# Altium PCB LLY.PcbDoc (part 1 of 2)
Units mm, origin at the board's own origin, x right, y up, seen from the top; angles counter-clockwise.
Board outline 253.36 x 130.77 mm, 2 copper layers (Top Layer, Bottom Layer), stack 0.325 mm thick; 280 components, 206 nets, 985 pads, 247 vias.
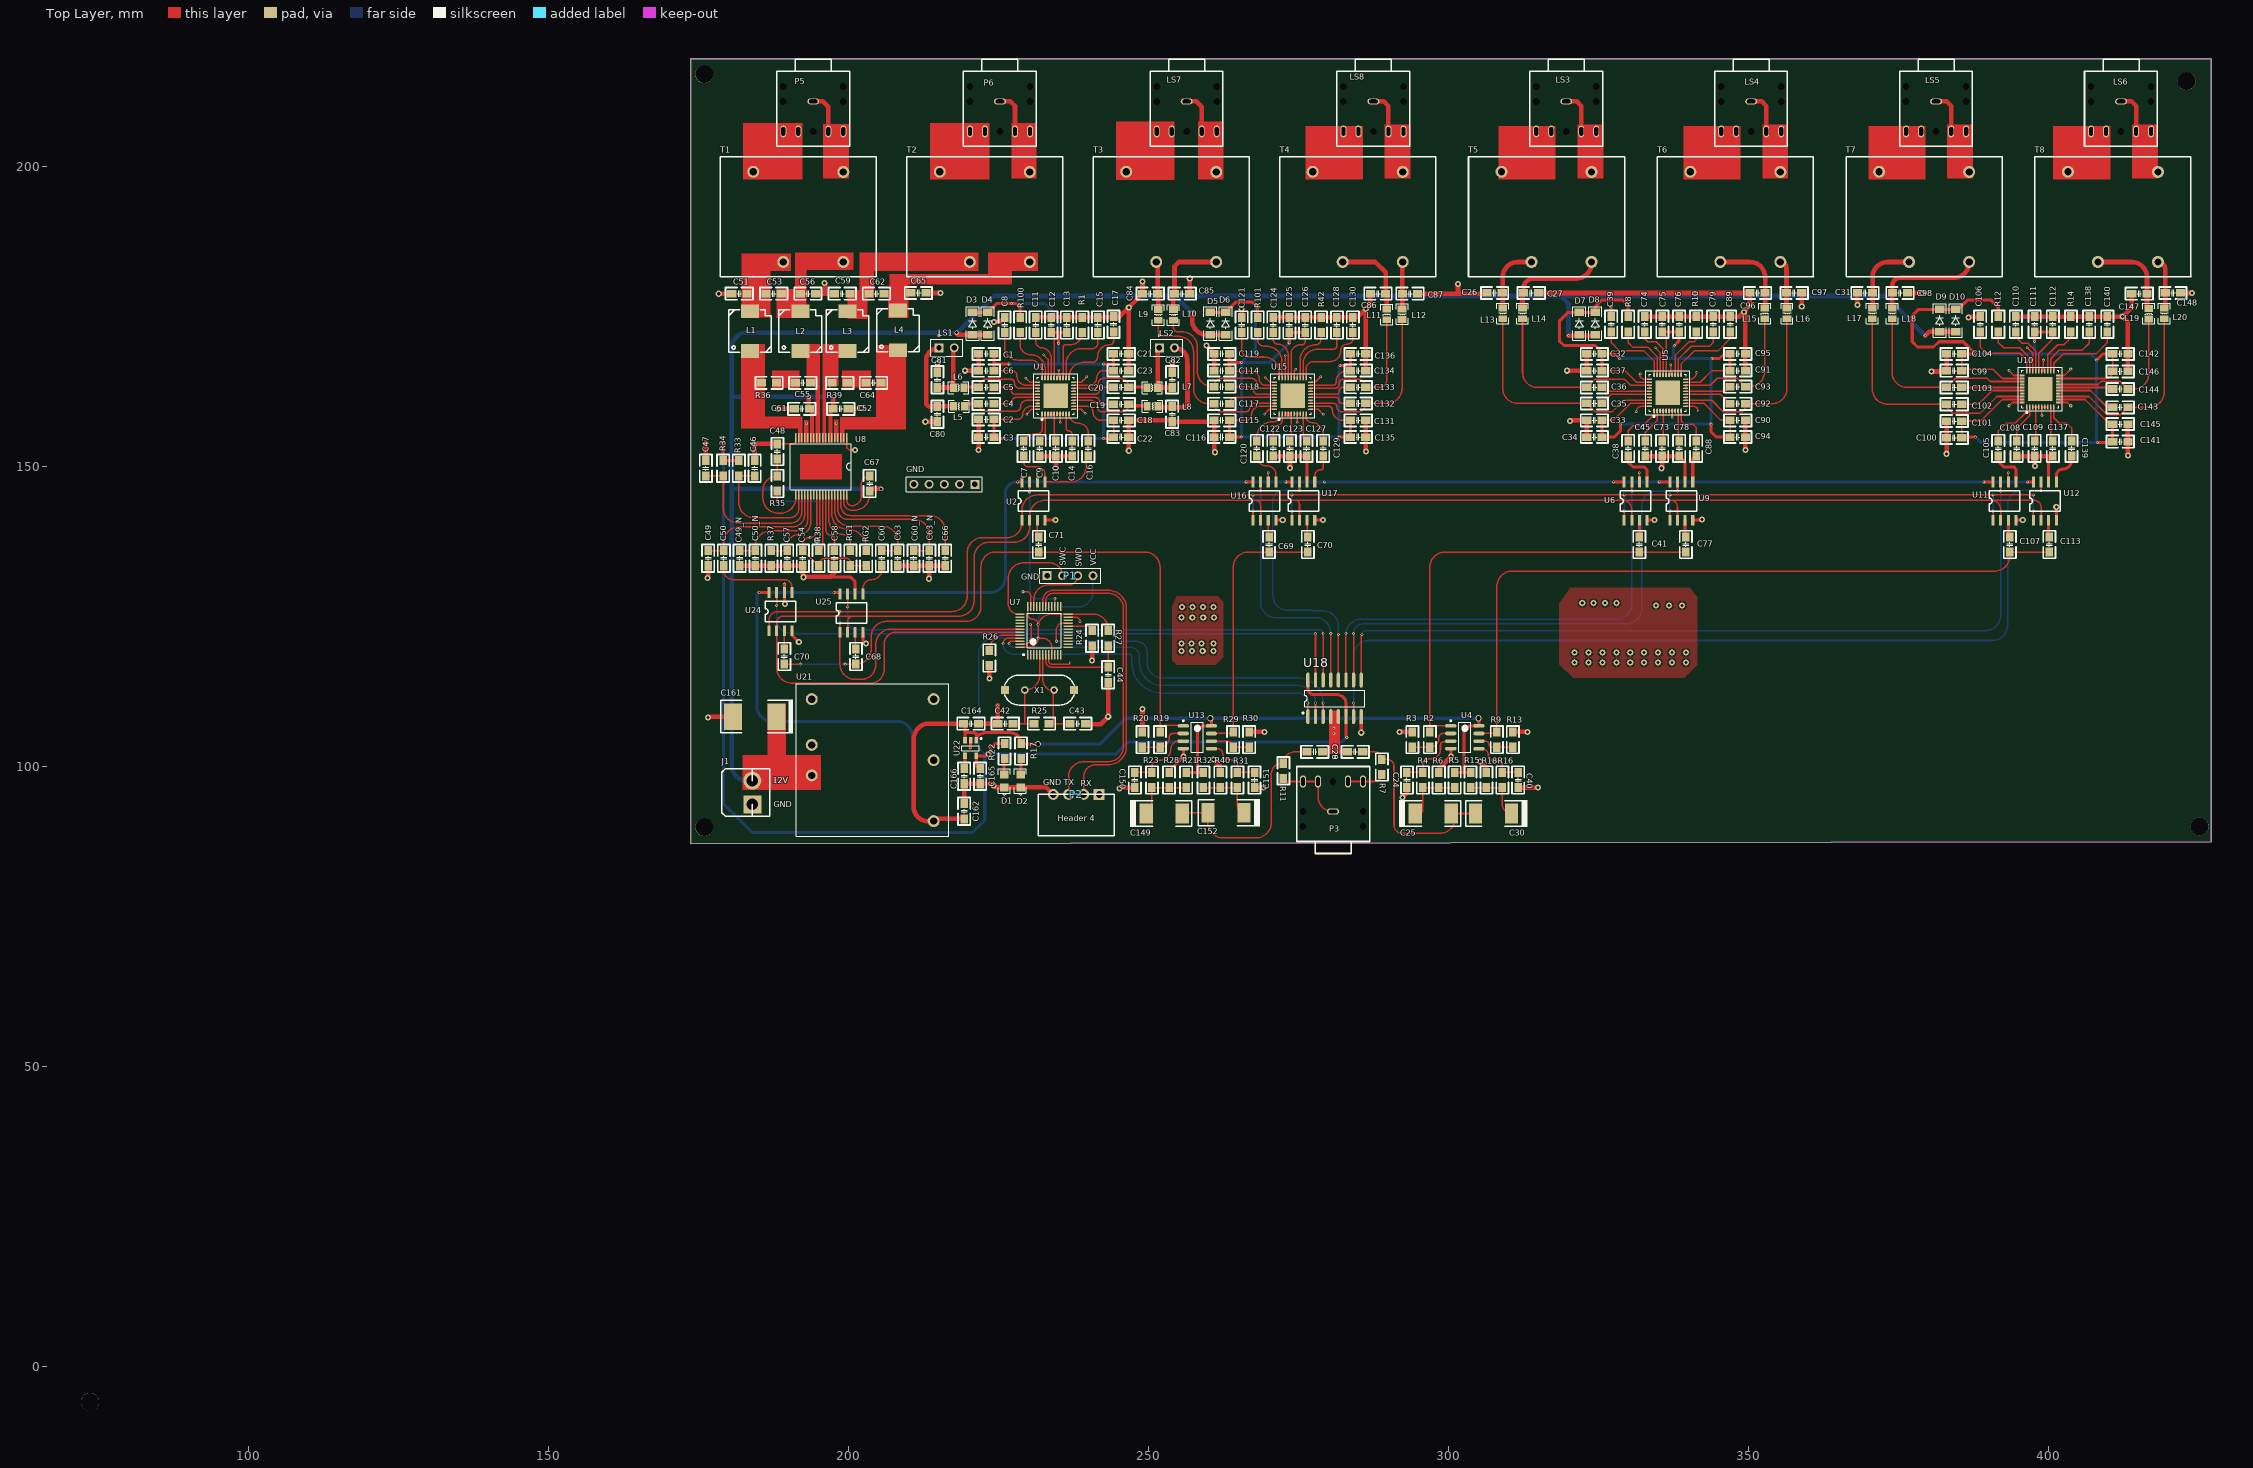
[diagram p0: Top Layer view]
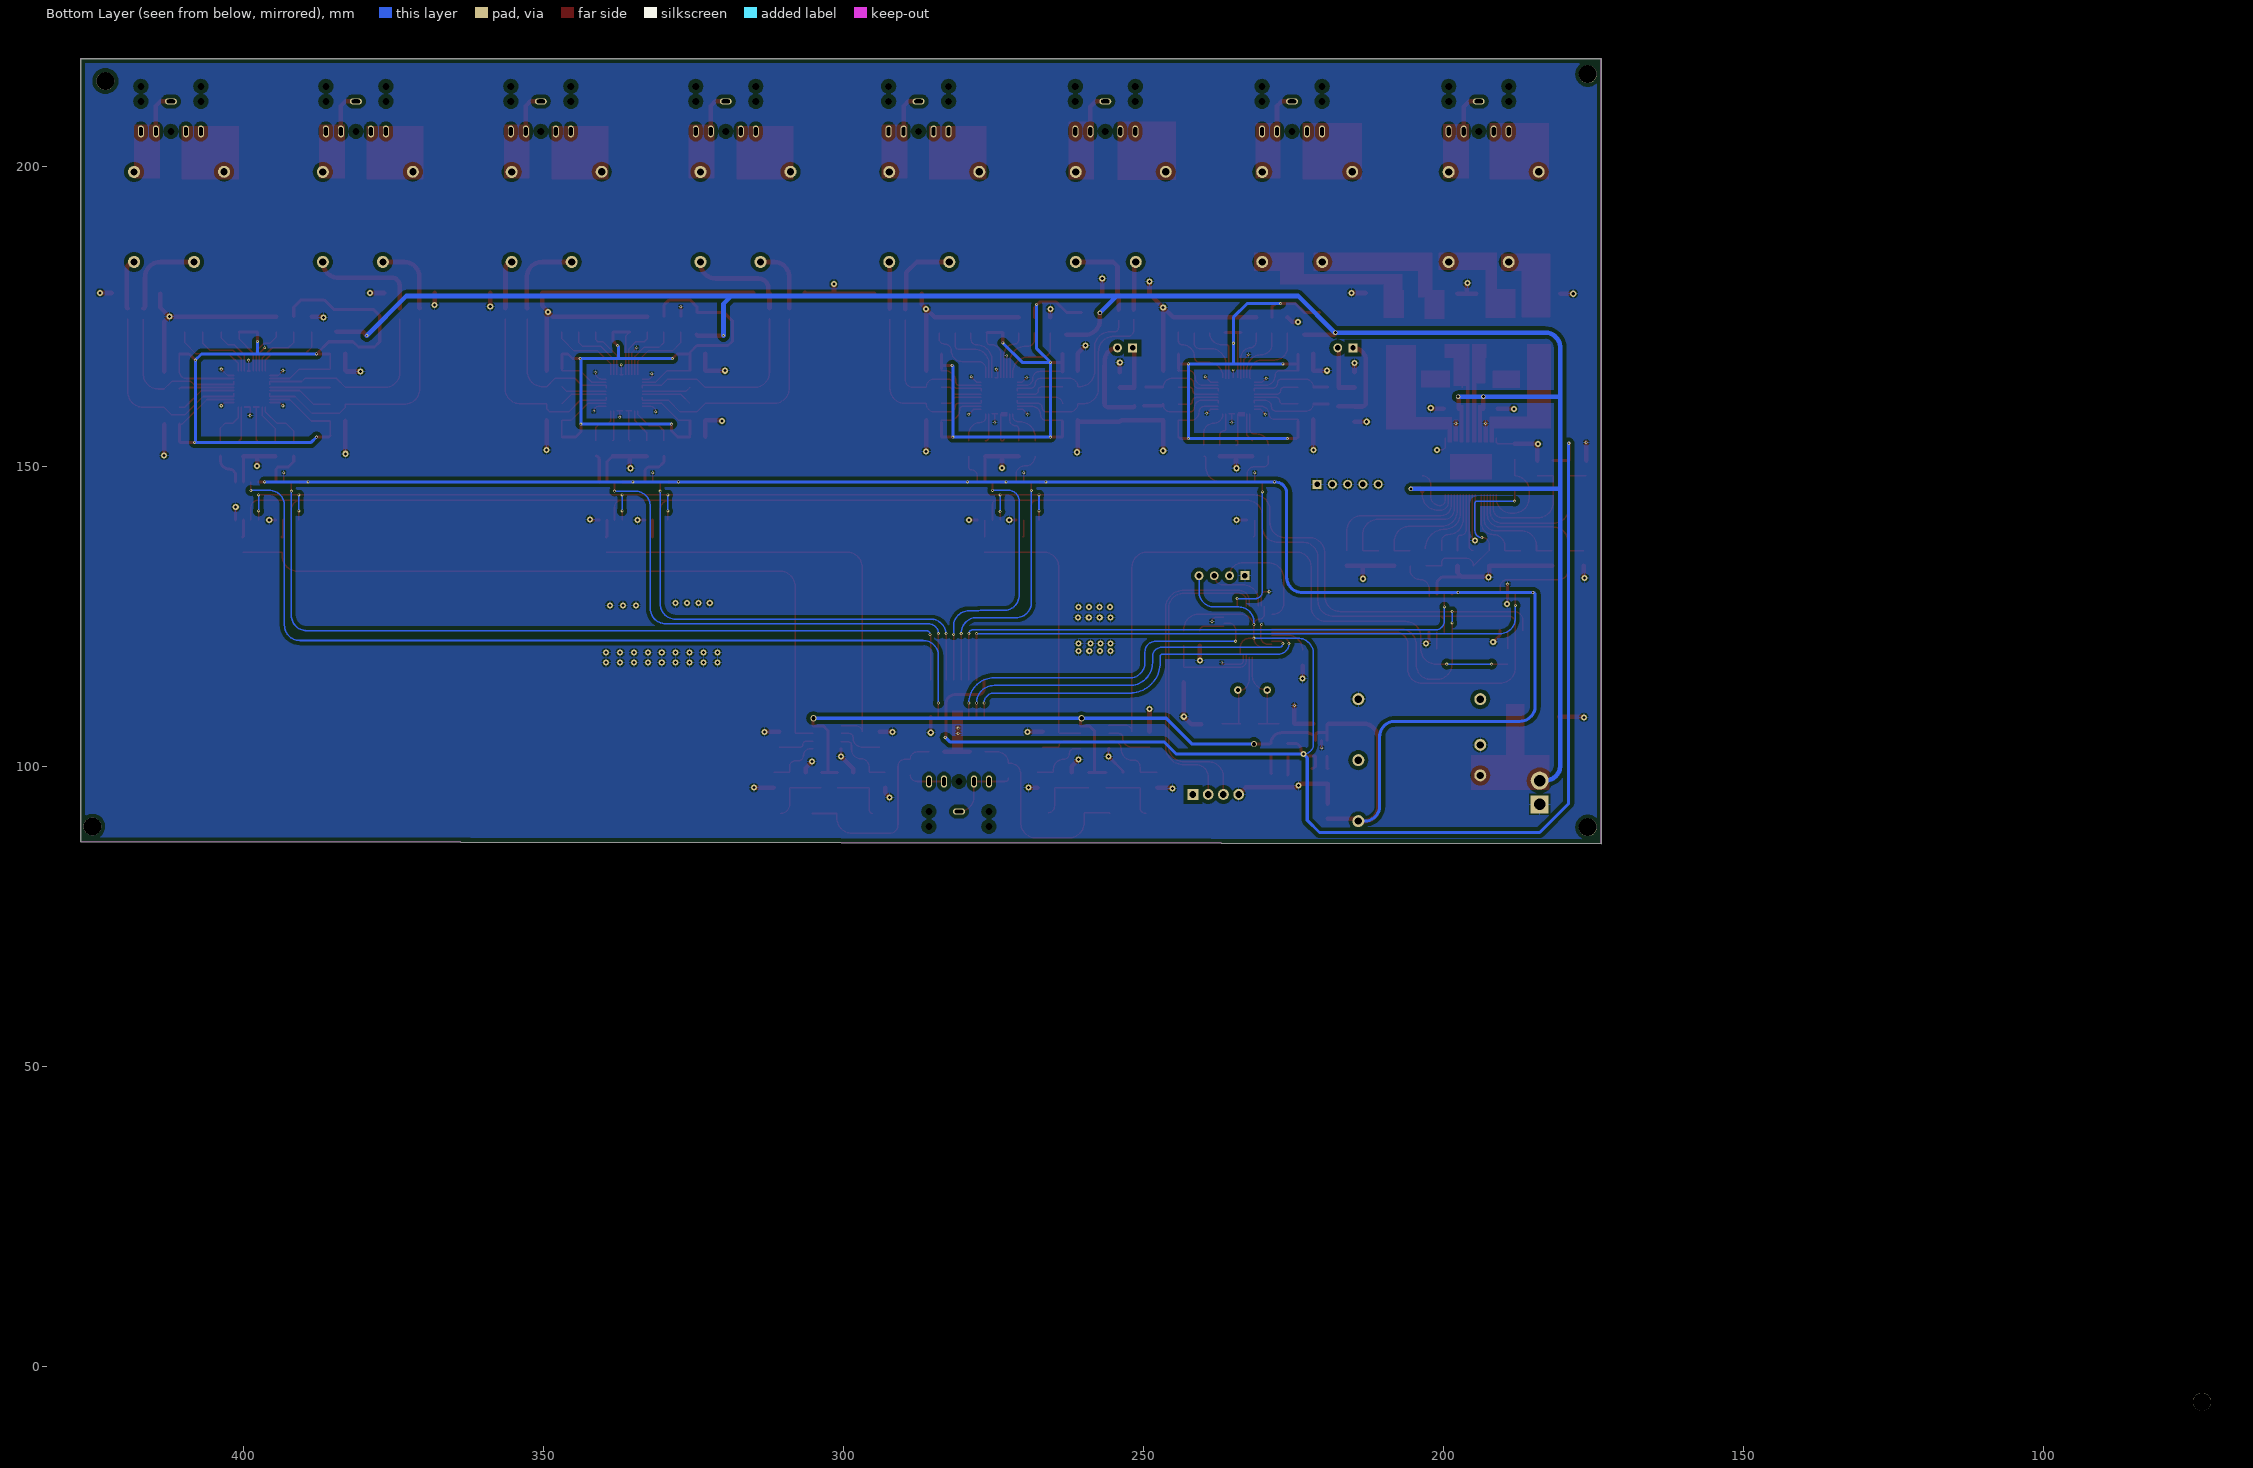
[diagram p1: Bottom Layer view, seen from below]

## Layer stack, top to bottom
Top Solder: solder mask 0.0102, Solder Resist, Dk 3.5
Top Layer: signal copper 0.0356
Dielectric 1: core 0.254, FR-4, Dk 4.2
Bottom Layer: signal copper 0.0356
Bottom Solder: solder mask 0.0102, Solder Resist, Dk 3.5

## Board outline
173.736,87.16 427.101,87.475 427.101,217.932 173.736,217.932

## Design rules (kind name [scope] priority, off if disabled: settings)
Clearance [All] p1: gap=0.152
PlaneClearance [All] p1: clearance=0.254
PlaneConnect [All] p1: planeconnectstyle=Relief reliefexpansion=0.381 reliefentries=4 reliefconductorwidth=0.254 reliefairgap=0.254
PolygonConnect [All] p1: connectstyle=Relief reliefconductorwidth=0.254 reliefentries=4 polygonreliefangle="90 Angle" airgapwidth=0.254
RoutingVias [All] p1: holewidth=0.508 width=1.016 viastyle="Through Hole" minholewidth=0.254 minwidth=0.254 maxholewidth=1.016 maxwidth=1.016
SolderMaskExpansion [All] p1: expansion=0.102
Width [All] p1: maxlimit=1.27 minlimit=0.254 preferedwidth=0.254
28 further rules are at their usual default settings.

## Classes and differential pairs
component class channel56: C31 C98 C99 C100 C101 C102 C103 C104 C105 C106 C107 C108 C109 C110 C111 C112 C113 C137 C138 C139 C140 C141 C142 C143 C144 C145 C146 C147 C148 D9 D10 L17 L18 L19 L20 LS5 LS6 R12 R14 T7 T8 U10 U11 U12
component class channel34: C26 C27 C32 C33 C34 C35 C36 C37 C38 C39 C41 C45 C73 C74 C75 C76 C77 C78 C79 C88 C89 C90 C91 C92 C93 C94 C95 C96 C97 D7 D8 L13 L14 L15 L16 LS3 LS4 R8 R10 T5 T6 U5 U6 U9
component class POWER: C161 C162 C164 C165 C166 D1 D2 J1 R17 R22 U21 U22
component class channel12: C69 C70 C84 C85 C86 C87 C114 C115 C116 C117 C118 C119 C120 C121 C122 C123 C124 C125 C126 C127 C128 C129 C130 C131 C132 C133 C134 C135 C136 D5 D6 L9 L10 L11 L12 LS7 LS8 R42 R101 T3 T4 U15 U16 U17
component class channel78: C46 C47 C48 C49 C49_N C50 C50_N C51 C52 C53 C54 C55 C56 C57 C58 C59 C60 C60_N C61 C62 C63 C63_N C64 C65 C66 C67 C68 C70 L1 L2 L3 L4 P5 P6 R33 R34 R35 R36 R37 R38 R39 RG1 RG2 T1 T2 U8 U24 U25
component class LLY: C42 C43 C44 GND P1 P2 R24 R25 R26 R27 U7 U18 X1
component class Audio_in: C24 C25 C28 C29 C30 C40 C149 C150 C151 C152 P3 R2 R3 R4 R5 R6 R7 R9 R11 R13 R15 R16 R18 R19 R20 R21 R23 R28 R29 R30 R31 R32 R40 U4 U13
component class Audio_out: C1 C2 C3 C4 C5 C6 C7 C8 C9 C10 C11 C12 C13 C14 C15 C16 C17 C18 C19 C20 C21 C22 C23 C71 C80 C81 C82 C83 D3 D4 L5 L6 L7 L8 LS1 LS2 R1 R100 U1 U2

## Components (designator, comment, footprint, x,y, rotation, side; value= is the part's Value field where it differs from the comment)
C1 "10uf" 0805C 224.282,168.783 r180 top
C2 "10uf" 0805C 221.742,157.861 r0 top
C3 "1uf" 0805C 221.742,154.94 r0 top
C4 "1uf" 0805C 224.282,160.477 r180 top
C5 "1uf" 0805C 221.742,163.246 r0 top
C6 "1uf" 0805C 224.282,165.989 r180 top
C7 "1uf" 0805C 229.256,154.305 r270 top
C8 "1uf" 0805C 226.06,174.879 r270 top
C9 "1uf" 0805C 231.902,154.305 r270 top
C10 "1uf" 0805C 234.633,154.305 r270 top
C11 "1uf" 0805C 231.249,174.879 r270 top
C12 "10uf" 0805C 233.843,172.339 r90 top
C13 "100nf" 0805C 236.438,172.339 r90 top
C14 "1uf" 0805C 237.321,154.305 r270 top
C15 "220pf" 0805C 241.627,174.879 r270 top
C16 "1uf" 0805C 240.009,154.305 r270 top
C17 "1uf" 0805C 244.221,172.466 r90 top
C18 "1uf" 0805C 244.221,157.709 r0 top
C19 "1uf" 0805C 244.221,160.401 r0 top
C20 "1uf" 0805C 246.761,163.246 r180 top
C21 "1uf" 0805C 246.761,168.783 r180 top
C22 "10uf" 0805C 244.221,154.94 r0 top
C23 "10uf" 0805C 246.761,166.014 r180 top
C24 "1uf" 0805C 293.116,99.06 r270 top
C25 "220uf" 6032c 294.513,92.202 r180 top
C26 "100nf" 0805C 308.991,178.943 r180 top
C27 "100nf" 0805C 315.087,178.943 r180 top
C28 "2.2nf" 0805C 283.21,102.489 r0 top
C29 "2.2nf" 0805C 276.479,102.489 r0 top
C30 "220uf" 6032c 310.515,92.202 r0 top
C31 "100nf" 0805C 370.713,178.943 r180 top
C32 "10uf" 0805C 325.628,168.783 r180 top
C33 "10uf" 0805C 323.088,157.709 r0 top
C34 "1uf" 0805C 323.088,154.94 r0 top
C35 "1uf" 0805C 325.628,160.528 r180 top
C36 "1uf" 0805C 323.088,163.195 r0 top
C37 "1uf" 0805C 325.628,166.014 r180 top
C38 "1uf" 0805C 329.982,154.305 r270 top
C39 "1uf" 0805C 327.152,175.006 r270 top
C40 "1uf" 0805C 311.658,99.06 r270 top
C41 "470nf" 0805C 331.851,138.303 r270 top
C42 "22PF" 0805C 224.917,107.188 r0 top
C43 "22PF" 0805C 239.522,107.188 r180 top
C44 "0.1uf" 0805C 243.332,116.586 r270 top
C45 "1uf" 0805C 332.813,154.305 r270 top
C46 "2.2pf" 0805C 184.404,148.463 r90 top
C47 "2.2pf" 0805C 176.276,151.003 r270 top
C48 "100nf" 0805C 188.214,153.797 r270 top
C49 "1nf" 0805C 176.657,136.017 r270 top
C49_N "1nf" 0805C 181.923,133.477 r90 top
C50 "470nf" 0805C 179.29,133.477 r90 top
C50_N "470nf" 0805C 184.556,133.477 r90 top
C51 "100nf" 0805C 183.134,178.816 r180 top
C52 "100nf" 0805C 200.025,159.639 r180 top
C53 "220nf" 0805C 186.309,178.816 r0 top
C54 "1nf" 0805C 192.456,136.017 r270 top
C55 "330pf" 0805C 191.177,163.957 r0 top
C56 "100nf" 0805C 194.564,178.816 r180 top
C57 "470nf" 0805C 189.823,133.477 r90 top
C58 "1nf" 0805C 197.722,136.017 r270 top
C59 "100nf" 0805C 200.279,178.816 r180 top
C60 "470nf" 0805C 205.621,133.477 r90 top
C60_N "470nf" 0805C 210.888,133.477 r90 top
C61 "100nf" 0805C 193.548,159.639 r180 top
C62 "220nf" 0805C 203.454,178.816 r0 top
C63 "1nf" 0805C 208.255,136.017 r270 top
C63_N "1nf" 0805C 213.521,136.017 r270 top
C64 "330pf" 0805C 202.946,163.957 r0 top
C65 "100nf" 0805C 212.979,178.943 r180 top
C66 "1nf" 0805C 216.154,136.017 r270 top
C67 "100nf" 0805C 203.581,148.463 r270 top
C68 "470nf" 0805C 201.295,119.634 r270 top
C69 "470nf" 0805C 270.129,138.303 r270 top
C70 "470nf" 0805C 189.357,117.094 r90 top
C70 "470nf" 0805C 276.606,138.303 r270 top
C71 "470nf" 0805C 231.775,138.303 r270 top
C73 "1uf" 0805C 335.643,154.305 r270 top
C74 "1uf" 0805C 332.74,175.006 r270 top
C75 "10uf" 0805C 335.661,172.466 r90 top
C76 "100nf" 0805C 338.473,172.466 r90 top
C77 "470nf" 0805C 339.598,138.303 r270 top
C78 "1uf" 0805C 338.473,154.305 r270 top
C79 "220pf" 0805C 344.134,175.006 r270 top
C80 "100nf" 0805C 214.884,160.02 r270 top
C81 "100nf" 0805C 214.884,165.735 r270 top
C82 "100nf" 0805C 254,163.195 r90 top
C83 "100nf" 0805C 254,157.48 r90 top
C84 "100nf" 0805C 251.587,178.816 r180 top
C85 "100nf" 0805C 256.921,178.816 r180 top
C86 "100nf" 0805C 289.56,178.816 r180 top
C87 "100nf" 0805C 294.894,178.816 r180 top
C88 "1uf" 0805C 341.303,154.305 r270 top
C89 "1uf" 0805C 346.964,172.466 r90 top
C90 "1uf" 0805C 346.964,157.709 r0 top
C91 "1uf" 0805C 349.504,166.014 r180 top
C92 "1uf" 0805C 346.964,160.477 r0 top
C93 "1uf" 0805C 349.504,163.322 r180 top
C94 "10uf" 0805C 346.964,154.94 r0 top
C95 "10uf" 0805C 349.504,168.783 r180 top
C96 "100nf" 0805C 352.806,178.943 r180 top
C97 "100nf" 0805C 358.902,178.943 r180 top
C98 "100nf" 0805C 376.555,178.943 r180 top
C99 "10uf" 0805C 385.572,165.989 r180 top
C100 "10uf" 0805C 383.032,154.813 r0 top
C101 "1uf" 0805C 383.032,157.607 r0 top
C102 "1uf" 0805C 385.572,160.401 r180 top
C103 "1uf" 0805C 383.032,163.195 r0 top
C104 "1uf" 0805C 385.572,168.783 r180 top
C105 "1uf" 0805C 391.65,154.305 r270 top
C106 "1uf" 0805C 388.62,175.006 r270 top
C107 "470nf" 0805C 393.573,138.303 r270 top
C108 "1uf" 0805C 394.716,154.305 r270 top
C109 "1uf" 0805C 397.71,154.305 r270 top
C110 "1uf" 0805C 394.589,175.006 r270 top
C111 "10uf" 0805C 397.71,172.466 r90 top
C112 "100nf" 0805C 400.739,172.466 r90 top
C113 "470nf" 0805C 400.177,138.303 r270 top
C114 "10uf" 0805C 263.525,166.014 r180 top
C115 "10uf" 0805C 260.985,157.709 r0 top
C116 "1uf" 0805C 260.985,154.94 r0 top
C117 "1uf" 0805C 263.525,160.477 r180 top
C118 "1uf" 0805C 260.985,163.322 r0 top
C119 "1uf" 0805C 263.525,168.783 r180 top
C120 "1uf" 0805C 268.097,154.305 r270 top
C121 "1uf" 0805C 265.557,174.879 r270 top
C122 "1uf" 0805C 270.859,154.305 r270 top
C123 "1uf" 0805C 273.621,154.305 r270 top
C124 "1uf" 0805C 270.855,174.879 r270 top
C125 "10uf" 0805C 273.504,172.339 r90 top
C126 "100nf" 0805C 276.152,172.339 r90 top
C127 "1uf" 0805C 276.384,154.305 r270 top
C128 "220pf" 0805C 281.45,174.879 r270 top
C129 "1uf" 0805C 279.146,154.305 r270 top
C130 "1uf" 0805C 284.099,172.339 r90 top
C131 "1uf" 0805C 283.718,157.709 r0 top
C132 "1uf" 0805C 283.718,160.528 r0 top
C133 "1uf" 0805C 286.258,163.246 r180 top
C134 "1uf" 0805C 286.258,166.014 r180 top
C135 "10uf" 0805C 283.718,154.94 r0 top
C136 "10uf" 0805C 286.258,168.783 r180 top
C137 "1uf" 0805C 400.739,154.305 r270 top
C138 "220pf" 0805C 406.799,175.006 r270 top
C139 "1uf" 0805C 403.86,154.305 r270 top
C140 "1uf" 0805C 409.829,172.466 r90 top
C141 "1uf" 0805C 410.718,154.178 r0 top
C142 "1uf" 0805C 413.258,168.783 r180 top
C143 "1uf" 0805C 410.718,159.893 r0 top
C144 "1uf" 0805C 413.258,162.941 r180 top
C145 "10uf" 0805C 410.718,157.099 r0 top
C146 "10uf" 0805C 413.258,165.862 r180 top
C147 "100nf" 0805C 416.433,178.816 r180 top
C148 "100nf" 0805C 422.021,178.943 r180 top
C149 "220uf" 6032c 249.682,92.202 r180 top
C150 "1uf" 0805C 247.777,99.06 r270 top
C151 "1uf" 0805C 267.716,99.06 r270 top
C152 "220uf" 6032c 265.938,92.329 r0 top
C161 "100uf" 7343C 188.087,108.331 r0 top
C162 "10uf" 0805C 219.329,93.853 r270 top
C164 "0.1uf" 0805C 221.742,107.188 r180 top
C165 "10uf" 0805C 221.996,97.155 r90 top
C166 "0.1uf" 0805C 219.329,97.155 r90 top
D1 "LED2" LED-0805 226.035,98.679 r270 top
D2 "LED2" LED-0805 228.727,98.679 r270 top
D3 "B3" "LL-34 - duplicate" 220.726,171.958 r90 top
D4 "B3" "LL-34 - duplicate" 223.266,171.958 r90 top
D5 "B3" "LL-34 - duplicate" 260.35,171.958 r90 top
D6 "B3" "LL-34 - duplicate" 262.89,171.958 r90 top
D7 "B3" "LL-34 - duplicate" 321.818,171.958 r90 top
D8 "B3" "LL-34 - duplicate" 324.485,171.958 r90 top
D9 "B3" "LL-34 - duplicate" 381.889,172.466 r90 top
D10 "B3" "LL-34 - duplicate" 384.556,172.466 r90 top
GND "Header 5" HDR1X5 221.107,147.066 r180 top
J1 "12V IN" VH3.96*2 184.023,93.726 r90 top
L1 "33uH" L-7X7S 183.642,172.593 r0 top
L2 "33uH" L-7X7S 192.024,172.593 r0 top
L3 "33uH" L-7X7S 199.898,172.593 r0 top
L4 "33uH" L-7X7S 208.28,172.72 r0 top
L5 "33uH" L0805 218.44,160.02 r0 top
L6 "33uH" L0805 218.44,163.195 r180 top
L7 "33uH" L0805 250.698,163.195 r180 top
L8 "33uH" L0805 250.698,160.02 r0 top
L9 "33uH" L0805 251.714,175.26 r90 top
L10 "33uH" L0805 254.254,175.26 r90 top
L11 "33uH" L0805 289.687,175.387 r270 top
L12 "33uH" L0805 292.354,175.387 r90 top
L13 "33uH" L0805 309.118,175.514 r90 top
L14 "33uH" L0805 312.42,175.514 r90 top
L15 "33uH" L0805 352.679,175.565 r270 top
L16 "33uH" L0805 356.489,175.514 r90 top
L17 "33uH" L0805 370.713,175.514 r90 top
L18 "33uH" L0805 374.015,175.514 r90 top
L19 "33uH" L0805 416.687,175.514 r270 top
L20 "33uH" L0805 419.354,175.514 r90 top
LS1 "Speaker" PIN2 215.138,169.799 r0 top
LS2 "Speaker" PIN2 251.841,169.799 r0 top
LS3 "Speaker" 耳机座 319.659,205.867 r270 top
LS4 "Speaker" 耳机座 350.478,205.867 r270 top
LS5 "Speaker" 耳机座 381.296,205.867 r270 top
LS6 "Speaker" 耳机座 412.115,205.867 r270 top
LS7 "Speaker" 耳机座 256.413,205.867 r270 top
LS8 "Speaker" 耳机座 287.528,205.867 r270 top
P1 "SWD" HDR1X4 233.172,131.826 r0 top
P2 "Header 4" XH2.54W-4P 231.648,95.377 r270 top
P3 "ARDIO_IN" 耳机座 280.797,97.536 r90 top
P5 "Header 2" 耳机座 194.183,205.867 r270 top
P6 "Header 2" 耳机座 225.298,205.867 r270 top
R1 "120K" 0805R 239.032,172.339 r90 top
R2 "1K" 0805R 296.926,105.791 r270 top
R3 "1K" 0805R 294.005,103.251 r90 top
R4 "1K" 0805R 295.765,99.06 r270 top
R5 "100K" 0805R 301.063,96.52 r90 top
R6 "100K" 0805R 298.414,99.06 r270 top
R7 "470R" 0805R 288.925,101.219 r270 top
R8 "10K" 0805R 329.982,175.006 r270 top
R9 "1K" 0805R 308.102,105.791 r270 top
R10 "120K" 0805R 341.303,172.466 r90 top
R11 "470R" 0805R 272.542,100.584 r270 top
R12 "10K" 0805R 391.65,175.006 r270 top
R13 "1K" 0805R 310.769,103.251 r90 top
R14 "120K" 0805R 403.769,172.466 r90 top
R15 "100K" 0805R 303.711,96.52 r90 top
R16 "1K" 0805R 309.009,99.06 r270 top
R17 "10K" 0805R 228.809,101.346 r90 top
R18 "100K" 0805R 306.36,99.06 r270 top
R19 "1K" 0805R 251.968,105.791 r270 top
R20 "1K" 0805R 249.047,103.251 r90 top
R21 "100K" 0805R 256.322,96.52 r90 top
R22 "10K" 0805R 226.06,101.346 r90 top
R23 "1K" 0805R 250.625,99.06 r270 top
R24 "10K" 0805R 240.665,120.142 r90 top
R25 "1M" 0805R 230.95,107.188 r0 top
R26 "10K" 0805R 223.52,119.38 r270 top
R27 "10K" 0805R 243.332,120.142 r90 top
R28 "100K" 0805R 253.474,99.06 r270 top
R29 "1K" 0805R 264.16,105.791 r270 top
R30 "1K" 0805R 266.827,103.251 r90 top
R31 "1K" 0805R 264.868,99.06 r270 top
R32 "100K" 0805R 259.207,96.52 r90 top
R33 "33K" 0805R 181.788,151.003 r270 top
R34 "33K" 0805R 179.172,151.003 r270 top
R35 "22R" 0805R 188.214,145.923 r90 top
R36 "22R" 0805R 185.547,163.957 r0 top
R37 "39K" 0805R 187.19,133.477 r90 top
R38 "100K" 0805R 195.072,133.477 r90 top
R39 "22R" 0805R 197.316,163.957 r0 top
R40 "100K" 0805R 262.019,99.06 r270 top
R42 "120K" 0805R 278.801,172.339 r90 top
R100 "10K" 0805R 228.654,174.879 r270 top
R101 "10K" 0805R 268.224,174.879 r270 top
RG1 "39K" 0805R 200.355,133.477 r90 top
RG2 "39K" 0805R 202.988,133.477 r90 top
T1 "Trans Eq" Transistor 178.689,181.61 r0 top
T2 "Trans Eq" Transistor 209.762,181.61 r0 top
T3 "Trans Eq" Transistor 240.834,181.61 r0 top
T4 "Trans Eq" Transistor 271.907,181.61 r0 top
T5 "Trans Eq" Transistor 303.371,181.61 r0 top
T6 "Trans Eq" Transistor 334.835,181.61 r0 top
T7 "Trans Eq" Transistor 366.3,181.61 r0 top
T8 "Trans Eq" Transistor 397.764,181.61 r0 top
U1 "PAM8610" QFN40-0.5 234.569,161.798 r90 top
U2 "X9C102/3/4" sop_8 228.981,141.097 r90 top
U4 "LM358D" D008_L 302.768,104.902 r0 top
U5 "PAM8610" QFN40-0.5 336.55,162.306 r90 top
U6 "X9C102/3/4" sop_8 329.311,141.097 r90 top
U7 "STM32F103C8T6" LQFP48_L 232.664,122.682 r90 top
U8 "TDA7492" POWERSSO-36 199.771,154.813 r270 top
U9 "X9C102/3/4" sop_8 336.931,141.097 r90 top
U10 "PAM8610" QFN40-0.5 398.653,162.941 r90 top
U11 "X9C102/3/4" sop_8 390.779,141.097 r90 top
U12 "X9C102/3/4" sop_8 397.51,141.097 r90 top
U13 "LM358D" D008_L 258.191,104.902 r0 top
U15 "PAM8610" QFN40-0.5 274.066,161.798 r90 top
U16 "X9C102/3/4" sop_8 267.462,141.097 r90 top
U17 "X9C102/3/4" sop_8 273.939,141.097 r90 top
U18 "74HD138" SOP16 281.051,111.379 r90 top
U21 "JSY1205" JSY_1205 191.389,88.392 r0 top
U22 "RT9193-33GB" SOT-23-5L 221.361,104.394 r270 top
U24 "X9C102/3/4" sop_8 186.817,122.682 r90 top
U25 "X9C102/3/4" sop_8 198.628,122.428 r90 top
X1 "8MHz" XTAL_US 234.315,112.776 r180 top

## Footprints (in the part's own frame and the unit in brackets; to place one, negate y for a bottom-side part, rotate by r counter-clockwise, add the part's x,y. Pads: shape width x height; smd on the part's side, far side on the other; paste and mask are expansions set on the pad)
0805C [mm]
  rect 1.524x1.25 smd: 1(0,0) 2(2.54,0)
  silkscreen extent -1.02,-1.02 3.56,1.02
0805R [mm]
  rect 1.524x1.25 smd: 1(0,0) 2(2.54,0)
  silkscreen extent -1.02,-1.02 3.56,1.02
6032c [mm]
  rect 2.2x3.3 smd: 1(0,0) 2(-6,0)
  silkscreen extent -7.6,-2.29 2.72,2.28
7343C [mm]
  rect 3x4.4 smd: 1(0,0) 2(-7.3,0)
  silkscreen extent -9.31,-2.84 2.7,2.84
D008_L [mm] "SOIC, 8-Leads, Body 4.9x3.9mm, Pitch 1.27mm, IPC High Density"
  oval 1.9x0.6 smd: 1(-2.35,1.905) 2(-2.35,0.635) 3(-2.35,-0.635) 4(-2.35,-1.905) 5(2.35,-1.905) 6(2.35,-0.635) 7(2.35,0.635) 8(2.35,1.905)
  silkscreen extent -2.47,-2.5 1,2.88, body extent -2,-2.5 2,2.5, height 1.75
HDR1X4 [mm] "Connector; Header; 4 Position"
  rect 1.5x1.5 hole 0.9: 1(0,0)
  round 1.5 hole 0.9: 2(2.54,0) 3(5.08,0) 4(7.62,0)
  silkscreen extent -1.27,-1.27 8.89,1.27
HDR1X5 [mm] "Connector; Header; 5 Position"
  rect 1.5x1.5 hole 0.9: 1(0,0)
  round 1.5 hole 0.9: 2(2.54,0) 3(5.08,0) 4(7.62,0) 5(10.16,0)
  silkscreen extent -1.27,-1.27 11.43,1.27
JSY_1205 [mm]
  round 2 hole 1.2: 1(2.54,22.86) 2(2.54,15.24) 3(2.54,10.16) 4(22.86,2.54) 5(22.86,12.7) 6(22.86,22.86)
  silkscreen extent 0,0 25.4,25.4
L0805 [mm]
  rect 1.15x1.45 smd: 1(-0.864,0.051) 2(0.914,0.051)
  silkscreen extent -1.68,-0.94 1.73,1.04
L-7X7S [mil]
  rect 118.11x90 smd: 1(0,-130) 2(0,130)
  Top Layer pour cut-out: -140,140 -140,-140 140,-140 140,100 100,140
  silkscreen extent -140,-140 140,140
LED-0805 [mil]
  rect 52x56 smd: 1(0,0) 2(84,0)
  silkscreen extent -38,-40 136,38, body extent -20,-32 105,32, height 10
"LL-34 - duplicate" [mm]
  rect 1.25x1.6 smd: 1(0,0) 2(3.75,0)
  silkscreen extent -0.92,-1.08 4.67,1.08
LQFP48_L [mm] "Thin QFP, 48-Leads, Body 7x7mm, Pitch 0.5mm, IPC High Density"
  oval 1.55x0.25 smd: 1(-4.025,2.75) 2(-4.025,2.25) 3(-4.025,1.75) 4(-4.025,1.25) 5(-4.025,0.75) 6(-4.025,0.25) 7(-4.025,-0.25) 8(-4.025,-0.75) 9(-4.025,-1.25) 10(-4.025,-1.75) 11(-4.025,-2.25) 12(-4.025,-2.75) 25(4.025,-2.75) 26(4.025,-2.25) 27(4.025,-1.75) 28(4.025,-1.25) 29(4.025,-0.75) 30(4.025,-0.25) 31(4.025,0.25) 32(4.025,0.75) 33(4.025,1.25) 34(4.025,1.75) 35(4.025,2.25) 36(4.025,2.75)
  oval 0.25x1.55 smd: 13(-2.75,-4.025) 14(-2.25,-4.025) 15(-1.75,-4.025) 16(-1.25,-4.025) 17(-0.75,-4.025) 18(-0.25,-4.025) 19(0.25,-4.025) 20(0.75,-4.025) 21(1.25,-4.025) 22(1.75,-4.025) 23(2.25,-4.025) 24(2.75,-4.025) 37(2.75,4.025) 38(2.25,4.025) 39(1.75,4.025) 40(1.25,4.025) 41(0.75,4.025) 42(0.25,4.025) 43(-0.25,4.025) 44(-0.75,4.025) 45(-1.25,4.025) 46(-1.75,4.025) 47(-2.25,4.025) 48(-2.75,4.025)
  silkscreen extent -4.15,-2.85 2.85,3.55, body extent -3.5,-3.5 3.5,3.5, height 1.6
PIN2 [mm] "Photosensitive Diode; 2 Leads"
  rect 1.5x1.5 hole 0.9: 1(0,0)
  round 1.5 hole 0.9: 2(2.54,0)
  silkscreen extent -1.4,-1.4 3.94,2.17
POWERSSO-36 [mm]
  rect 1.6x0.28 smd: 1(0,0)
  oval 1.6x0.28 smd: 2(0,-0.5) 3(0,-1) 4(0,-1.5) 5(0,-2) 6(0,-2.5) 7(0,-3) 8(0,-3.5) 9(0,-4) 10(0,-4.5) 11(0,-5) 12(0,-5.5) 13(0,-6) 14(0,-6.5) 15(0,-7) 16(0,-7.5) 17(0,-8) 18(0,-8.5) 19(9.5,-8.5) 20(9.5,-8) 21(9.5,-7.5) 22(9.5,-7) 23(9.5,-6.5) 24(9.5,-6) 25(9.5,-5.5) 26(9.5,-5) 27(9.5,-4.5) 28(9.5,-4) 29(9.5,-3.5) 30(9.5,-3) 31(9.5,-2.5) 32(9.5,-2) 33(9.5,-1.5) 34(9.5,-1) 35(9.5,-0.5) 36(9.5,0)
  Top Layer region: 2.667,-7.794 6.985,-7.794 6.985,-0.794 2.667,-0.794
  silkscreen extent 1,-9.4 8.62,0.78
QFN40-0.5 [mm] "Thin QFP, 48-Leads, Body 7x7mm, Pitch 0.5mm, IPC High Density"
  oval 0.813x0.292 smd: 1(-3,2.25) 2(-3,1.75) 3(-3,1.25) 4(-3,0.75) 5(-3,0.25) 6(-3,-0.25) 7(-3,-0.75) 8(-3,-1.25) 9(-3,-1.75) 10(-3,-2.25) 21(3,-2.25) 22(3,-1.75) 23(3,-1.25) 24(3,-0.75) 25(3,-0.25) 26(3,0.25) 27(3,0.75) 28(3,1.25) 29(3,1.75)
  oval 0.292x0.813 smd: 11(-2.25,-3) 12(-1.75,-3) 13(-1.25,-3) 14(-0.75,-3) 15(-0.25,-3) 16(0.25,-3) 17(0.75,-3) 18(1.25,-3) 19(1.75,-3) 20(2.25,-3) 31(2.25,3) 32(1.75,3) 33(1.25,3) 34(0.75,3) 35(0.25,3) 36(-0.25,3) 37(-0.75,3) 39(-1.75,3) 40(-2.25,3)
  oval 0.8x0.3 smd: 30(3,2.25)
  oval 0.3x0.8 smd: 38(-1.25,3)
  rect 4.064x4.064 smd: 41(0,0)
  silkscreen extent -4.07,-3.65 3.65,3.65
SOP16 [mm] "SOP, 16-Leads, Body 9.90x3.90mm, Pitch 1.27mm, IPC Medium Density"
  oval 2.5x0.55 smd: 1(-3.035,4.445) 2(-3.035,3.175) 3(-3.035,1.905) 4(-3.035,0.635) 5(-3.035,-0.635) 6(-3.035,-1.905) 7(-3.035,-3.175) 8(-3.035,-4.445) 9(3.06,-4.445) 10(3.06,-3.175) 11(3.06,-1.905) 12(3.06,-0.635) 13(3.06,0.635) 14(3.06,1.905) 15(3.06,3.175) 16(3.06,4.445)
  silkscreen extent -2.55,-5 1.37,5.39, body extent -3.99,-5.1 3.93,5.1, height 1.8
sop_8 [mil]
  rect 70x20 smd: 1(0,0) 2(0,-50) 3(0,-100) 4(0,-150) 5(250,-150) 6(250,-100) 7(250,-50) 8(250,0)
  silkscreen extent 59,-175 192,25, body extent 56,-176 192,27, height 80
SOT-23-5L [mm]
  rect 1.1x0.6 smd: 1(0,0) 2(0,-0.95) 3(0,-1.9) 4(2.6,-1.9) 5(2.6,0)
  silkscreen extent -0.42,-2.4 1.73,0.92
Transistor [mm]
  round 2 hole 1.2: 1(10.5,2.5) 2(20.5,2.5) 3(20.5,17.5) 4(5.5,17.526)
  silkscreen extent 0,0 26.04,20
VH3.96*2 [mm]
  rect 3x3 hole 1.9: 1(0,0)
  round 3 hole 1.9: 2(3.96,0)
  silkscreen extent -2,-2.92 5.97,5.08
XH2.54W-4P [mm]
  rect 1.8x1.8 hole 1.1: 1(0,10.16)
  round 1.8 hole 1.1: 2(0,7.62) 3(0,5.08) 4(0,2.54)
  silkscreen extent 0,0 6.9,12.7
XTAL_US [mil]
  round 50 hole 28: 1(0,0) 2(192.13,0)
  rect 50x50 smd: ""(-130.32,0) ""(322.44,0)
  silkscreen extent -131,-98 323,98
耳机座 [mm]
  round 0.762 hole 1.204: 0(-7.5,5) 0(-7.5,-5) 0(-5,5) 0(-5,-5)
  round 0.762 hole 1.2: 0(0,0)
  oval 1x2 hole 0.635 slot 1.397 at 90 deg: 1(-5,0)
  oval 2x1 hole 0.635 slot 1.397 at 0 deg: 1(0,5) 1(0,2.5) 2(0,-2.5) 2(0,-5)
  silkscreen extent -12,-6.1 2.5,6.05

## Part data
C1 C2 C3 C4 C5 C6 C7 C8 C9 C10 C11 C12 C13 C14 C15 C16 C17 C18 C19 C20 C21 C22 C23 C24 C26 C27 C28 C29 C31 C32 C33 C34 C35 C36 C37 C38 C39 C40 C41 C42 C43 C44 C45 C46 C47 C48 C49 C49_N C50 C50_N C51 C52 C53 C54 C55 C56 C57 C58 C59 C60 C60_N C61 C62 C63 C63_N C64 C65 C66 C67 C68 C69 C70 C70 C71 C73 C74 C75 C76 C77 C78 C79 C80 C81 C82 C83 C84 C85 C86 C87 C88 C89 C90 C91 C92 C93 C94 C95 C96 C97 C98 C99 C100 C101 C102 C103 C104 C105 C106 C107 C108 C109 C110 C111 C112 C113 C114 C115 C116 C117 C118 C119 C120 C121 C122 C123 C124 C125 C126 C127 C128 C129 C130 C131 C132 C133 C134 C135 C136 C137 C138 C139 C140 C141 C142 C143 C144 C145 C146 C147 C148 C150 C151 C162 C165 C166: library part Cap, "Capacitor"
C25 C30 C149 C152 C161: library part "Cap Pol1", "Polarized Capacitor (Radial)"
C164: library part Cap, "capacitor"
D1 D2: "Typical RED, GREEN, YELLOW, AMBER GaAs LED"
D3 D4 D5 D6 D7 D8 D9 D10: library part "Diode 1N4148", "High Conductance Fast Diode"
GND: "Header, 5-Pin"
J1 P3: library part "Header 2", "Header, 2-Pin"
L1 L2 L3 L4 L5 L6 L7 L8 L9 L10 L11 L12 L13 L14 L15 L16 L17 L18 L19 L20: library part Inductor, "Inductor"
LS1 LS2 LS3 LS4 LS5 LS6 LS7 LS8: "Loudspeaker"
P1: library part "Header 4"
P2: "Header, 4-Pin"
P5 P6: "Header, 2-Pin"
R1 R8 R10 R12 R14 R17 R22 R24 R25 R26 R27 R42 R100 R101: library part Res2, "Resistor"
R2 R3 R4 R5 R6 R7 R9 R11 R13 R15 R16 R18 R19 R20 R21 R23 R28 R29 R30 R31 R32 R33 R34 R35 R36 R37 R38 R39 R40 RG1 RG2: library part R
T1 T2 T3 T4 T5 T6 T7 T8: "Transformer (Equivalent Circuit Model)"
U4 U13: "Dual Operational Amplifier"
U7: library part STM32F103CBT6, "STM32单片机48脚"
U18: "74HC138"
U21: library part "Header 3X2", "Header, 3-Pin, Dual row"
U22: library part RT9193, "电源芯片"
X1: library part XTAL, "Crystal Oscillator"

## Free pads (board coordinates)
  round 3 hole 3: 0(73.66,-5.842) 0(176.022,89.916) 0(176.022,215.392) 0(423.037,214.249) 0(425.196,90.043)

## Via types
v1: diameter 1.016, hole 0.508, Top Layer to Bottom Layer, 114 vias
v2: diameter 0.508, hole 0.254, Top Layer to Bottom Layer, 96 vias
v3: diameter 0.381, hole 0.254, Top Layer to Bottom Layer, 29 vias
v4: diameter 0.762, hole 0.508, Top Layer to Bottom Layer, 5 vias
v5: diameter 1.016, hole 0.711, Top Layer to Bottom Layer, 3 vias

## Nets (pads, with @x,y where several pads share a name; then routed paths per layer and width w, separated by ;. In a path a pad name is that pad's centre, name@x,y a point inside that pad or via, vN(x,y) a via of type N, cw(c..) or ccw(c..) an arc to the next point about the centre after c; other vN are vias at no path point)
3.3V: C165.2 P1.4 R22.2 R27.2 R33.1 R34.1 U7.9 U7.24 U7.36 U7.48 U18.6 U18.16 U22.5 | length 280.6
  Top Layer w0.254: U7.48@228.639,119.932 230.168,119.932 ccw(c230.168,121.412) v2(231.648,121.412) ; U7.36@229.914,126.707 229.914,125.432 ccw(c230.759,125.432) 230.759,124.587 cw(c230.759,123.698) v2(231.648,123.698) 231.648,123.231 ; U7.9@233.914,118.657 233.914,119.888 ccw(c232.39,119.888) 232.39,121.412 v2(231.648,121.412) ; R27.2@243.332,122.682 243.332,122.892 ccw(c240.792,122.892) 240.792,125.432 U7.24@236.689,125.432 234.652,125.432 ccw(c234.652,124.079) 234.431,125.414 234.188,125.414 ccw(c234.188,122.874) 233.802,125.384 ccw(c233.802,123.231) 231.648,123.231 ; v2(231.648,121.412) 231.648,123.231
  Top Layer w0.508: v2(179.172,153.899) R34.1@179.172,151.003 R33.1@181.788,151.003 ; C165.2@221.996,99.695 cw(c221.996,100.33) 221.361,100.33 U22.5@221.361,101.794 222.825,101.794 ccw(c222.825,102.743) 223.774,102.743 cw(c224.917,102.743) 224.917,103.886 R22.2@226.06,103.886 ; U18.16@276.606,114.439 276.606,113.03 ccw(c277.622,113.03) 277.622,112.014 281.432,112.014 cw(c281.432,110.49) 282.956,110.49 U18.6@282.956,108.344 282.956,105.029 v2(283.083,104.902)
  Bottom Layer w0.254: v1(223.393,102.108) cw(c223.393,103.759) 221.742,103.759 221.742,118.872 cw(c224.282,118.872) 224.282,121.412 v2(231.648,121.412) ; v2(231.648,123.698) 231.648,124.079 cw(c234.188,124.079) 234.188,126.619 238.252,126.619 ccw(c238.252,129.159) 240.792,129.159 P1.4@240.792,131.826
  Bottom Layer w0.508: v2(179.172,153.899) 179.197,153.924 179.197,93.853 184.023,89.027 220.726,89.027 222.758,91.059 222.758,101.473 v1(223.393,102.108) 244.602,102.108 246.634,104.14 282.321,104.14 v2(283.083,104.902)
5V: C162.2 C164.2 R5.2 R15.2 R17.2 R21.2 R32.2 U2.8 U4.8 U6.8 U9.8 U11.8 U12.8 U13.8 U16.8 U17.8 U21.4 U22.1 U22.3 U24.8 U25.8 | length 456.1
  Top Layer w0.508: v2(185.166,129.032) U24.8@186.817,129.032 ; v2(197.612,129.032) 198.374,129.032 cw(c198.374,128.778) U25.8@198.628,128.778 ; C164.2@219.202,107.188 cw(c219.202,106.929) 219.461,106.929 219.461,105.791 ; U22.3@219.461,104.394 219.461,105.791 ; v2(228.219,147.447) U2.8@228.981,147.447 ; v5(231.648,103.759) 228.936,103.759 R17.2@228.809,103.886 ccw(c227.031,103.886) 228.645,104.631 ccw(c227.031,103.886) 227.031,105.664 222.631,105.664 ccw(c222.631,105.537) 222.504,105.537 ccw(c222.504,104.394) U22.1@221.361,104.394 221.361,105.283 ccw(c220.98,105.283) 220.98,105.664 219.588,105.664 cw(c219.588,105.791) 219.461,105.791 ; R21.2@256.322,99.06 258.064,99.06 ; R32.2@259.207,99.06 258.064,99.06 ; v5(260.35,108.077) 260.541,107.886 U13.8@260.541,106.807 259.08,106.807 258.191,105.918 258.191,99.187 258.064,99.06 ; v2(266.319,147.447) U16.8@267.462,147.447 ; v2(272.923,147.447) U17.8@273.939,147.447 ; R5.2@301.063,99.06 302.641,99.06 ; R15.2@303.711,99.06 302.641,99.06 ; v5(305.054,108.077) 305.118,108.013 U4.8@305.118,106.807 303.403,106.807 302.641,106.045 302.641,99.06 ; v2(327.533,147.447) U6.8@329.311,147.447 ; v2(335.153,147.447) U9.8@336.931,147.447 ; v2(389.255,147.447) U11.8@390.779,147.447 ; v2(396.494,147.447) U12.8@397.51,147.447
  Top Layer w0.762: C164.2@219.202,107.188 213.487,107.188 ccw(c213.487,104.648) 210.947,104.648 210.947,93.218 ccw(c213.233,93.218) 213.233,90.932 U21.4@214.249,90.932 cw(c214.63,90.932) 214.63,91.313 C162.2@219.329,91.313
  Bottom Layer w0.508: U21.4@214.249,90.932 213.233,90.932 cw(c213.233,93.472) 210.693,93.472 210.693,105.029 ccw(c208.153,105.029) 208.153,107.569 187.325,107.569 cw(c187.325,110.109) 184.785,110.109 184.785,128.651 cw(c185.166,128.651) v2(185.166,129.032) v2(197.612,129.032) 223.647,129.032 ccw(c223.647,131.572) 226.187,131.572 226.187,145.542 cw(c228.092,145.542) 228.092,147.447 v2(228.219,147.447) v2(266.319,147.447) v2(272.923,147.447) v2(279.4,147.447) v2(327.533,147.447) v2(335.153,147.447) v2(389.255,147.447) v2(396.494,147.447) ; v5(231.648,103.759) 241.935,103.759 246.253,108.077 v5(260.35,108.077) v5(305.054,108.077)
12V: C52.2 C61.1 C67.2 C161.1 D3.1 D4.1 D5.1 D6.1 D7.1 D8.1 D9.1 D10.1 J1.2 U8.6 U8.7 U8.12 U8.13 U8.35 U21.3 | length 371.3
  Top Layer w0.254: U8.35@199.271,145.313 199.271,144.01 ccw(c200.533,144.01) 200.533,142.748 201.041,142.748 ccw(c201.041,145.288) 203.581,145.288 C67.2@203.581,145.923
  Top Layer w0.762: v4(193.421,161.671) 193.421,159.766 ccw(c193.548,159.766) C61.1@193.548,159.639 ; C52.2@197.485,159.639 197.485,161.544 cw(c197.612,161.544) v4(197.612,161.671) ; C67.2@203.581,145.923 cw(c203.962,145.923) 203.962,146.304 v4(205.486,146.304) ; v4(218.059,172.339) ccw(c218.44,172.339) 218.44,171.958 D3.1@220.726,171.958 D4.1@223.266,171.958 ; v4(257.302,175.641) 257.302,174.498 ccw(c259.842,174.498) 259.842,171.958 D5.1@260.35,171.958 D6.1@262.89,171.958 ; v2(320.04,171.831) 324.358,171.831 D8.1@324.485,171.958 ; v2(379.476,171.831) 380.111,172.466 D9.1@381.889,172.466 D10.1@384.556,172.466
  Bottom Layer w0.762: J1.2@184.023,97.686 183.134,97.686 cw(c183.134,100.226) 180.594,100.226 180.594,146.304 ; v4(197.612,161.671) v4(193.421,161.671) 180.721,161.671 ccw(c180.721,161.544) 180.594,161.544 ; v4(205.486,146.304) 180.594,146.304 ; v4(257.302,175.641) 254.508,178.435 ; v2(320.04,171.831) 320.04,177.165 318.77,178.435 ; v2(379.476,171.831) 372.872,178.435 318.77,178.435 ; 180.594,146.304 180.594,161.544 ; 180.594,161.544 180.594,169.799 cw(c183.134,169.799) 183.134,172.339 v4(218.059,172.339) 218.186,172.339 224.282,178.435 254.508,178.435 ; 254.508,178.435 318.77,178.435
DGND: C1.2 C2.1 C3.1 C6.2 C8.1 C9.2 C10.2 C11.1 C12.2 C13.2 C14.2 C15.1 C17.2 C18.2 C21.1 C22.2 C23.1 C24.2 C26.2 C27.1 C28.1 C29.2 C31.2 C32.2 C33.1 C34.1 C37.2 C39.1 C40.2 C42.1 C43.1 C44.2 C45.2 C46.2 C47.1 C48.1 C49.2 C49_N.1 C50_N.1 C51.2 C52.1 C54.2 C56.1 C57.1 C58.2 C59.2 C60_N.1 C61.2 C63.2 C63_N.2 C65.1 C66.2 C73.2 C74.1 C75.2 C76.2 C78.2 C79.1 C80.2 C81.1 C82.2 C83.1 C84.2 C85.1 C86.2 C87.1 C89.2 C90.2 C91.1 C94.2 C95.1 C96.2 C97.1 C98.1 C99.2 C100.1 C101.1 C104.2 C106.1 C108.2 C109.2 C110.1 C111.2 C112.2 C114.2 C115.1 C116.1 C119.2 C121.1 C122.2 C123.2 C124.1 C125.2 C126.2 C127.2 C128.1 C130.2 C131.2 C134.1 C135.2 C136.1 C137.2 C138.1 C140.2 C141.2 C142.1 C145.2 C146.1 C147.2 C148.1 C150.2 C151.2 C161.2 C162.1 C164.1 C165.1 C166.1 D1.2 D2.2 GND.1 GND.2 GND.3 GND.4 GND.5 J1.1 P1.1 P2.4 R1.2 R3.2 R6.1 R10.2 R13.2 R14.2 R18.1 R20.2 R24.1 R26.2 R28.1 R30.2 R37.1 R40.1 R42.2 U1.6 U1.7 U1.8 U1.11 U1.20 U1.24 U1.25 U1.28 U1.31 U1.40 U2.4 U2.6 U4.4 U5.6 U5.7 U5.8 U5.11 U5.20 U5.24 U5.25 U5.28 U5.31 U5.40 U6.4 U6.6 U7.8 U7.23 U7.35 U7.47 U8.1 U8.4 U8.5 U8.14 U8.15 U8.18 U8.27 U9.4 U9.6 U10.6 U10.7 U10.8 U10.11 U10.20 U10.24 U10.25 U10.28 U10.31 U10.40 U11.4 U11.6 U12.4 U12.6 U13.4 U15.6 U15.7 U15.8 U15.11 U15.20 U15.24 U15.25 U15.28 U15.31 U15.40 U16.4 U16.6 U17.4 U17.6 U18.4 U18.5 U18.8 U21.2 U21.6 U22.2 U24.4 U24.6 U25.4 U25.6 | length 591
  Top Layer w0.254: C48.1@188.214,153.797 191.008,153.797 191.271,154.06 U8.18@191.271,154.813 ; v1(194.818,137.668) 195.271,138.121 U8.27@195.271,145.313 ; U8.1@199.771,154.813 199.771,153.162 200.152,152.781 v1(201.168,152.781) ; U7.47@228.639,120.432 229.398,120.432 ccw(c229.398,121.539) 230.505,121.539 230.505,123.571 ccw(c230.378,123.571) v2(230.378,123.698) ; v2(229.108,129.159) 229.743,129.159 cw(c229.743,128.488) 230.414,128.488 U7.35@230.414,126.707 ; v3(229.616,164.719) 230.287,164.048 U1.31@231.569,164.048 ; v3(229.743,158.75) 230.541,159.548 U1.40@231.569,159.548 ; U2.6@231.521,147.447 v3(231.521,148.971) ; v3(232.537,168.656) 233.319,167.874 U1.28@233.319,164.798 ; U7.8@233.414,118.657 233.414,117.614 ccw(c233.934,117.614) 233.934,117.094 236.728,117.094 ccw(c236.728,117.348) v3(236.982,117.348) ; U1.6@234.819,158.798 U1.7@235.319,158.798 ; 235.069,164.798 235.069,166.108 v3(235.077,166.116) ; v3(235.331,157.353) 235.319,157.365 U1.7@235.319,158.798 ; U1.8@235.819,158.798 U1.7@235.319,158.798 ; U7.23@236.689,124.932 237.907,124.932 cw(c237.907,124.206) v2(238.633,124.206) ; U1.11@237.569,159.548 238.851,159.548 v3(239.522,158.877) ; U1.20@237.569,164.048 238.851,164.048 v3(239.776,164.973) ; v3(269.367,158.75) 270.165,159.548 U15.40@271.066,159.548 ; v3(269.494,164.846) 270.292,164.048 U15.31@271.066,164.048 ; U16.6@270.002,147.447 v3(270.002,148.971) ; U15.28@272.816,164.798 v3(272.816,168.509) ; U15.6@274.316,158.798 U15.8@275.316,158.798 ; v3(274.574,166.243) 274.316,165.985 U15.25@274.316,164.798 U15.24@274.816,164.798 ; U15.7@274.816,158.798 274.816,157.365 v3(274.828,157.353) ; U15.11@277.066,159.548 278.348,159.548 v3(279.146,158.75) ; U15.20@277.066,164.048 277.84,164.048 v3(278.765,164.973) ; v3(331.343,159.131) cw(c332.268,159.131) 332.268,160.056 U5.40@333.55,160.056 ; v3(331.83,148.971) ccw(c331.83,148.928) 331.787,148.928 cw(c331.787,148.864) 331.851,148.864 U6.6@331.851,147.447 ; v3(331.978,165.481) 331.851,165.481 ccw(c332.776,165.481) 332.776,164.556 U5.31@333.55,164.556 ; v3(334.518,169.799) 335.3,169.017 U5.28@335.3,165.306 ; U5.6@336.8,159.306 U5.8@337.8,159.306 ; v3(337.058,167.005) 337.058,165.564 cw(c336.848,165.564) 336.848,165.354 ccw(c336.848,165.306) U5.25@336.8,165.306 U5.24@337.3,165.306 ; U5.7@337.3,159.306 337.3,158.254 v3(337.312,158.242) ; U5.11@339.55,160.056 340.832,160.056 cw(c340.832,159.258) v3(341.63,159.258) ; U5.20@339.55,164.556 340.197,164.556 ccw(c340.197,165.735) v3(341.376,165.735) ; U11.6@393.319,147.447 v3(393.319,148.971) ; v2(393.446,160.147) 393.99,160.691 U10.40@395.653,160.691 ; v2(393.446,165.989) 394.244,165.191 U10.31@395.653,165.191 ; v3(396.494,169.799) 397.403,168.89 U10.28@397.403,165.941 ; v2(398.907,158.496) 398.903,158.5 U10.6@398.903,159.941 U10.7@399.403,159.941 U10.8@399.903,159.941 ; v2(399.161,167.767) 399.161,166.199 U10.25@398.903,165.941 U10.24@399.403,165.941 ; U10.11@401.653,160.691 403.189,160.691 v2(403.733,160.147) ; U10.20@401.653,165.191 402.681,165.191 v2(403.733,166.243)
  Top Layer w0.508: v2(189.357,130.429) U24.6@189.357,129.032 189.357,127.254 v1(189.484,127.127) ; U24.4@190.627,122.682 190.627,121.92 v1(191.77,120.777) ; 197.053,131.648 200.33,131.648 201.168,130.81 U25.6@201.168,128.778 ; U25.4@202.438,122.428 202.438,121.031 v1(202.946,120.523) ; v3(220.345,103.124) 220.411,103.19 U22.2@220.411,104.394 ; U2.4@232.791,141.097 v1(234.569,141.097) ; R28.1@253.474,99.06 253.474,99.296 v1(255.905,101.727) 255.905,102.933 U13.4@255.841,102.997 ; U16.4@271.272,141.097 v1(272.415,141.097) ; C127.2@276.384,151.765 276.479,151.67 U17.6@276.479,147.447 ; U17.4@277.749,141.097 v1(279.146,141.097) ; v1(285.496,105.664) U18.8@285.496,108.344 ; v1@300.418,101.791 U4.4@300.418,102.997 ; C39.1@327.152,175.006 v3(327.152,176.657) ; U6.4@333.121,141.097 v1(334.391,141.097) ; C78.2@338.473,151.765 339.471,150.767 U9.6@339.471,147.447 ; U9.4@340.741,141.097 342.138,141.097 v1(342.265,141.224) ; U11.4@394.589,141.097 v1(395.732,141.097) ; U12.6@400.05,147.447 400.05,151.765 ; U12.4@401.32,141.097 v1(401.32,143.256)
  Top Layer w0.762: C47.1@176.276,151.003 v2(176.276,154.051) ; v1(176.53,131.445) 176.657,131.572 C49.2@176.657,133.477 ; v1(176.657,108.204) 176.784,108.331 C161.2@180.787,108.331 ; v1(178.435,178.816) C51.2@180.594,178.816 ; C49_N.1@181.923,133.477 C50_N.1@184.556,133.477 R37.1@187.19,133.477 C57.1@189.823,133.477 C54.2@192.456,133.477 192.456,131.648 197.053,131.648 197.722,132.317 C58.2@197.722,133.477 ; v1(184.277,153.797) v1@184.404,153.797 ; C46.2@184.404,151.003 v1@184.404,153.797 ; C48.1@188.214,153.797 v1@184.404,153.797 ; v1(188.341,159.639) C61.2@191.008,159.639 ; C56.1@194.564,178.816 196.151,178.816 ; v1(196.088,180.594) 196.151,180.53 196.151,178.816 ; C59.2@197.739,178.816 196.151,178.816 ; C52.1@200.025,159.639 202.057,159.639 v1(202.184,159.766) ; C63.2@208.255,133.477 C60_N.1@210.888,133.477 C63_N.2@213.521,133.477 ; v1(212.852,157.48) C80.2@214.884,157.48 ; C65.1@212.979,178.943 v1(215.392,178.943) ; v1(213.487,131.318) 213.521,131.352 C63_N.2@213.521,133.477 ; C81.1@214.884,165.735 v1(214.884,167.259) ; C66.2@216.154,133.477 C63_N.2@213.521,133.477 ; C162.1@219.329,93.853 C166.1@219.329,97.155 C165.1@221.996,97.155 223.901,97.155 v1(224.206,96.85) 224.511,96.545 D1.2@226.035,96.545 D2.2@228.727,96.545 233.02,96.545 P2.4@234.188,95.377 ; v1(219.456,165.989) C6.2@221.742,165.989 C1.2@221.742,168.783 ; C164.1@221.742,107.188 C42.1@224.917,107.188 v2(224.917,110.236) ; v1(221.742,152.781) C3.1@221.742,154.94 C2.1@221.742,157.861 ; v1(223.52,114.681) R26.2@223.52,116.84 ; v1(224.282,174.117) 225.298,174.117 C8.1@226.06,174.879 ; C11.1@231.249,174.879 C12.2@233.843,174.879 C13.2@236.438,174.879 R1.2@239.032,174.879 C15.1@241.627,174.879 245.11,174.879 v1(246.761,176.53) ; C9.2@231.902,151.765 C10.2@234.633,151.765 ; v1(234.569,149.733) 234.633,149.797 C10.2@234.633,151.765 ; C14.2@237.321,151.765 C10.2@234.633,151.765 ; 240.411,107.061 242.062,107.061 v1(243.332,108.331) C44.2@243.332,114.046 ; v1(240.665,117.729) R24.1@240.665,120.142 ; v1(245.237,96.393) 245.364,96.52 C150.2@247.777,96.52 ; v1(246.761,152.654) C22.2@246.761,154.94 C18.2@246.761,157.709 246.786,157.734 253.746,157.734 C83.1@254,157.48 260.756,157.48 C115.1@260.985,157.709 C116.1@260.985,154.94 260.985,152.527 v1(261.112,152.4) ; C23.1@246.761,166.014 C21.1@246.761,168.783 v1(246.761,176.53) ; R20.2@249.047,105.791 v1(249.047,109.601) ; v1(249.047,180.848) C84.2@249.047,178.816 v1(246.761,176.53) ; C82.2@254,165.735 v1(254,167.386) ; C85.1@256.921,178.816 v1(256.921,181.356) ; v1(259.715,170.18) 260.985,168.91 C119.2@260.985,168.783 C114.2@260.985,166.014 ; v1(260.858,101.219) 262.019,100.058 R40.1@262.019,99.06 ; C121.1@265.557,174.879 v1(265.557,176.276) ; R30.2@266.827,105.791 v1(269.367,105.791) ; C151.2@267.716,96.52 v1(269.24,96.52) ; C124.1@270.855,174.879 C125.2@273.504,174.879 C126.2@276.152,174.879 R42.2@278.801,174.879 C128.1@281.45,174.879 C130.2@284.099,174.879 284.861,174.879 v1(286.258,176.276) ; C122.2@270.859,151.765 C123.2@273.621,151.765 ; v1(273.621,149.796) C123.2@273.621,151.765 ; C127.2@276.384,151.765 C123.2@273.621,151.765 ; C29.2@279.019,102.489 C28.1@283.21,102.489 ; v1(286.258,152.527) C135.2@286.258,154.94 C131.2@286.258,157.709 ; C134.1@286.258,166.014 C136.1@286.258,168.783 v1(286.258,176.276) ; C86.2@287.02,178.816 287.02,177.038 v1(286.258,176.276) ; v1(291.846,105.791) R3.2@294.005,105.791 ; v1(292.354,94.869) 293.116,95.631 C24.2@293.116,96.52 ; C87.1@294.894,178.816 301.625,178.816 ; R6.1@298.414,99.06 298.414,99.659 v1(300.482,101.727) v1@300.418,101.791 ; v1(301.625,180.467) 301.625,178.816 ; v1(305.308,100.838) 306.36,99.786 R18.1@306.36,99.06 ; C26.2@306.451,178.943 306.324,178.816 301.625,178.816 ; R13.2@310.769,105.791 v1(313.182,105.791) ; C40.2@311.658,96.52 v1(314.96,96.52) ; C27.1@315.087,178.943 C96.2@350.266,178.943 350.266,176.784 v1(349.25,175.768) ; v1(319.786,165.989) 319.811,166.014 C37.2@323.088,166.014 C32.2@323.088,168.783 ; v1(320.294,157.607) 320.396,157.709 C33.1@323.063,157.709 ; C34.1@323.063,154.965 C33.1@323.063,157.709 ; C33.1@323.088,157.709 C33.1@323.063,157.709 ; C74.1@332.74,175.006 C75.2@335.661,175.006 C76.2@338.473,175.006 R10.2@341.303,175.006 C79.1@344.134,175.006 C89.2@346.964,175.006 348.488,175.006 v1(349.25,175.768) ; C45.2@332.813,151.765 C73.2@335.643,151.765 ; v1(335.534,149.733) 335.643,149.842 C73.2@335.643,151.765 ; C78.2@338.473,151.765 C73.2@335.643,151.765 ; v1(349.504,152.781) C94.2@349.504,154.94 C90.2@349.504,157.709 ; C91.1@349.504,166.014 C95.1@349.504,168.783 349.504,175.514 v1(349.25,175.768) ; v1(358.902,176.657) C97.1@358.902,178.943 ; v1(368.173,176.911) C31.2@368.173,178.943 ; C98.1@376.555,178.943 v1(378.968,178.943) ; v1(380.492,165.862) 382.905,165.862 C99.2@383.032,165.989 C104.2@383.032,168.783 ; v1(383.032,152.146) C100.1@383.032,154.813 C101.1@383.032,157.607 ; v1(386.715,174.879) 386.842,175.006 C106.1@388.62,175.006 ; C110.1@394.589,175.006 C111.2@397.71,175.006 C112.2@400.739,175.006 R14.2@403.769,175.006 C138.1@406.799,175.006 C140.2@409.829,175.006 v1(412.369,175.006) ; C108.2@394.716,151.765 C109.2@397.71,151.765 ; v1(397.764,150.114) 397.71,150.168 C109.2@397.71,151.765 ; 400.05,151.765 C109.2@397.71,151.765 ; v1(413.258,151.892) C141.2@413.258,154.178 C145.2@413.258,157.099 ; C146.1@413.258,165.862 C142.1@413.258,168.783 413.258,174.117 v1(412.369,175.006) ; C147.2@413.893,178.816 413.893,176.53 v1(412.369,175.006) ; C148.1@422.021,178.943 v1(423.926,178.943)
  Bottom Layer w0.762: v1(249.047,109.601) v1@249.174,109.601
  other v1: 321.056,117.348 323.374,117.348 325.691,117.348 328.009,117.348 330.327,117.348 332.645,117.348 334.962,117.348 337.28,117.348 339.598,117.348 321.056,118.999 323.374,118.999 325.691,118.999 328.009,118.999 330.327,118.999 332.645,118.999 334.962,118.999 337.28,118.999 339.598,118.999 255.524,119.253 257.302,119.253 259.08,119.253 260.858,119.253 255.524,120.523 257.217,120.523 258.911,120.523 260.858,120.523 255.524,124.841 257.344,124.841 259.165,124.841 260.985,124.841 255.651,126.619 257.387,126.619 259.122,126.619 260.858,126.619 334.645,126.873 336.804,126.873 338.963,126.873 322.326,127.254 324.231,127.254 326.136,127.254 328.041,127.254 192.532,131.572
  other v2: 280.924,105.537 280.924,106.426 193.04,157.226 197.993,157.226
INC: U2.1 U6.1 U7.42 U9.1 U11.1 U12.1 U16.1 U17.1 U24.1 U25.1 | length 300.1
  Top Layer w0.254: U24.1@186.817,122.682 186.817,124.333 cw(c188.341,124.333) 188.341,125.857 v2(198.628,125.857) 217.297,125.857 ccw(c217.297,128.397) 219.837,128.397 219.837,135.636 cw(c222.377,135.636) 222.377,138.176 226.441,138.176 ccw(c226.441,140.716) 228.981,140.716 U2.1@228.981,141.097 228.981,142.748 cw(c231.521,142.748) 231.521,145.288 v2(267.462,145.288) v2(273.939,145.288) v2(329.311,145.288) v2(336.931,145.288) v2(390.779,145.288) v2(397.51,145.288) ; v2(198.628,123.952) U25.1@198.628,122.428 198.628,117.094 ccw(c201.168,117.094) 201.168,114.554 202.184,114.554 ccw(c202.184,116.967) 204.597,116.967 204.597,120.392 cw(c207.137,120.392) 207.137,122.932 U7.42@228.639,122.932 ; U16.1@267.462,141.097 v2(267.462,142.621) ; U17.1@273.939,141.097 v2(273.939,142.494) ; U6.1@329.311,141.097 v2(329.311,142.621) ; U9.1@336.931,141.097 v2(336.931,142.621) ; U11.1@390.779,141.097 v2(390.779,142.621) ; U12.1@397.51,141.097 v2(397.51,142.621)
  Bottom Layer w0.254: v2(198.628,123.952) v2(198.628,125.857) ; v2(267.462,142.621) v2(267.462,145.288) ; v2(273.939,142.494) 273.939,145.161 cw(c274.066,145.161) 274.066,145.288 v2(273.939,145.288) ; v2(329.311,142.621) v2(329.311,145.288) ; v2(336.931,142.621) v2(336.931,145.288) ; v2(390.779,142.621) v2(390.779,145.288) ; v2(397.51,142.621) v2(397.51,145.288)
LEFT1: C41.2 C77.2 R2.1 U4.1 | length 75.6
  Top Layer w0.254: U4.1@300.418,106.807 297.942,106.807 ccw(c297.942,105.791) R2.1@296.926,105.791 296.926,133.223 cw(c299.466,133.223) 299.466,135.763 C41.2@331.851,135.763 C77.2@339.598,135.763
LEFT2: C107.2 C113.2 R9.1 U4.7 | length 123
  Top Layer w0.254: U4.7@305.118,105.537 307.848,105.537 ccw(c307.848,105.791) R9.1@308.102,105.791 308.102,130.048 cw(c310.642,130.048) 310.642,132.588 391.033,132.588 ccw(c391.033,135.128) 393.573,135.128 C107.2@393.573,135.763 C113.2@400.177,135.763
NetC4_1: C4.1 U1.36 | length 7.9
  Top Layer w0.254: C4.1@224.282,160.477 226.898,160.477 ccw(c226.898,160.909) 227.33,160.909 cw(c227.969,160.909) 227.969,161.548 U1.36@231.569,161.548
NetC4_2: C4.2 L5.2 U1.37 U1.38 | length 14.6
  Top Layer w0.254: C4.2@221.742,160.477 ccw(c222.961,160.477) 222.961,159.258 227.965,159.258 ccw(c227.965,160.02) 228.727,160.02 cw(c229.755,160.02) 229.755,161.048 U1.37@231.569,161.048 U1.38@231.569,160.548
  Top Layer w0.508: L5.2@219.202,160.477 C4.2@221.742,160.477
NetC5_1: C5.1 L6.1 U1.33 U1.34 | length 14.4
  Top Layer w0.254: C5.1@221.742,163.246 cw(c223.088,163.246) 223.088,164.592 227.076,164.592 cw(c227.076,163.957) 227.711,163.957 ccw(c228.62,163.957) 228.62,163.048 U1.33@231.569,163.048 U1.34@231.569,162.548
  Top Layer w0.508: L6.1@219.329,163.246 C5.1@221.742,163.246
NetC5_2: C5.2 U1.35 | length 8
  Top Layer w0.254: C5.2@224.282,163.246 226.644,163.246 cw(c226.644,162.687) 227.203,162.687 ccw(c227.842,162.687) 227.842,162.048 U1.35@231.569,162.048
NetC7_1: C7.1 U1.1 | length 7.2
  Top Layer w0.254: C7.1@229.256,153.543 cw(c231.161,153.543) 231.161,155.448 231.521,155.448 ccw(c231.521,156.246) 232.319,156.246 U1.1@232.319,158.798
NetC7_2: C7.2 C16.2 U2.5 | length 17.3
  Top Layer w0.254: C7.2@229.256,151.765 ccw(c229.256,151.744) 229.235,151.744 229.235,150.749 ccw(c229.997,150.749) 229.997,149.987 231.521,149.987 cw(c231.521,148.717) 232.791,148.717 U2.5@232.791,147.447 237.109,147.447 ccw(c237.109,149.987) 239.649,149.987 239.649,151.405 cw(c240.009,151.405) C16.2@240.009,151.765
NetC8_2: C8.2 U1.30 | length 12.2
  Top Layer w0.254: C8.2@226.06,172.339 226.06,169.926 ccw(c228.219,169.926) 228.219,167.767 230.287,167.767 cw(c230.287,165.735) 232.319,165.735 U1.30@232.319,164.798 ; U1.30@232.292,164.798 232.292,164.671 U1.30@232.319,164.671
NetC9_1: C9.1 U1.2 | length 4.9
  Top Layer w0.254: C9.1@231.902,154.305 232.819,155.222 U1.2@232.819,158.798
NetC10_1: C10.1 U1.3 U1.4 U1.5 | length 5.7
  Top Layer w0.254: U1.5@234.192,158.925 U1.5@234.195,158.795 ; C10.1@234.308,154.297 234.319,153.856 ccw(c234.633,153.856) C10.1@234.633,153.543 ; U1.5@234.319,158.798 234.319,154.618 C10.1@234.633,154.305
NetC11_2: C11.2 U1.27 | length 9.3
  Top Layer w0.254: C11.2@231.249,172.339 231.249,170.938 ccw(c232.407,170.938) 232.201,169.798 ; U1.27@233.819,164.671 233.819,168.136 ccw(c232.156,168.136) 232.407,169.78 ; 232.201,169.798 cw(c232.156,168.136) 232.407,169.78 ; 232.201,169.798 ccw(c232.407,170.938) 232.407,169.78
NetC14_1: C14.1 U1.9 | length 5.8
  Top Layer w0.254: U1.9@236.319,158.798 236.319,156.365 ccw(c236.728,156.365) 236.728,155.956 cw(c236.728,155.363) 237.321,155.363 C14.1@237.321,153.543
NetC15_2: C15.2 U1.22 | length 11.5
  Top Layer w0.254: U1.22@236.319,164.671 U1.22@236.319,164.798 236.319,167.132 cw(c238.859,167.132) 238.859,169.672 240.665,169.672 ccw(c240.665,170.634) 241.627,170.634 C15.2@241.627,172.339
NetC16_1: C16.1 U1.10 | length 7.1
  Top Layer w0.254: U1.10@236.819,158.798 ccw(c238.391,158.798) 238.391,157.226 cw(c238.391,155.608) 240.009,155.608 C16.1@240.009,153.543
NetC17_1: C17.1 U1.21 | length 12.5
  Top Layer w0.254: U1.21@236.819,164.798 236.819,164.937 cw(c239.268,164.937) 239.268,167.386 240.665,167.386 ccw(c240.665,168.275) 241.554,168.245 ccw(c240.665,168.275) 241.554,168.275 cw(c243.586,168.275) 242.183,169.744 cw(c243.586,168.275) 243.586,170.307 ccw(c243.586,170.942) 244.221,170.942 C17.1@244.221,172.466
NetC19_1: C19.1 U1.15 | length 7.3
  Top Layer w0.254: U1.15@237.569,161.548 241.169,161.548 cw(c241.169,160.782) 241.935,160.782 ccw(c242.316,160.782) 242.316,160.401 C19.1@244.221,160.401
NetC19_2: C19.2 L8.1 U1.13 U1.14 | length 15
  Top Layer w0.254: U1.13@237.569,160.548 U1.14@237.569,161.048 240.399,161.048 cw(c240.399,159.893) 241.554,159.893 ccw(c242.316,159.893) 242.316,159.131 245.491,159.131 ccw(c245.491,160.401) C19.2@246.761,160.401
  Top Layer w0.508: C19.2@246.761,160.401 ccw(c247.015,160.401) 247.015,160.147 L8.1@250.063,160.147
NetC20_1: C20.1 L7.2 U1.17 U1.18 | length 14.4
  Top Layer w0.254: U1.17@237.569,162.548 U1.18@237.569,163.048 240.899,163.048 ccw(c240.899,163.83) 241.681,163.83 cw(c242.57,163.83) 242.57,164.719 245.288,164.719 cw(c245.288,163.246) C20.1@246.761,163.246
  Top Layer w0.508: C20.1@246.761,163.246 L7.2@249.682,163.246
NetC20_2: C20.2 U1.16 | length 7.3
  Top Layer w0.254: U1.16@237.569,162.048 241.169,162.048 ccw(c241.169,162.687) 241.808,162.687 cw(c242.367,162.687) 242.367,163.246 C20.2@244.221,163.246
NetC24_1: C24.1 R4.1 U4.3 | length 11
  Top Layer w0.254: C24.1@293.116,99.06 R4.1@295.765,99.06 295.765,99.931 cw(c297.18,99.931) 297.18,101.346 ccw(c297.18,102.87) 298.704,102.87 298.704,103.632 cw(c299.212,103.632) 299.212,104.14 300.291,104.14 ccw(c300.291,104.267) U4.3@300.418,104.267
NetC25_1: C25.1 R4.2 R5.1 R6.2 | length 10
  Top Layer w0.254: C25.1@295.148,92.198 ccw(c295.148,92.815) 295.765,92.815 R4.2@295.765,96.52 R6.2@298.414,96.52 R5.1@301.063,96.52
NetC25_2: C25.2 C28.2 C30.2 R7.1 | length 33.7
  Top Layer w0.254: C28.2@285.75,102.489 287.655,102.489 cw(c287.655,101.219) R7.1@288.925,101.219 289.814,101.219 cw(c289.814,100.076) 290.957,100.076 290.957,90.297 ccw(c292.354,90.297) 292.354,88.9 298.608,88.9 ccw(c298.608,91.44) 301.148,91.44 301.148,92.198 301.148,92.202 C30.2@305.277,92.202
NetC26_1: C26.1 L13.2 T5.1 | length 11.4
  Top Layer w0.762: L13.2@309.067,176.428 309.067,181.57 cw(c311.607,181.57) 311.607,184.11 T5.1@313.871,184.11
NetC27_2: C27.2 L14.2 T5.2 | length 17.3
  Top Layer w0.762: L14.2@312.369,176.428 312.369,178.765 cw(c312.547,178.765) C27.2@312.547,178.943 312.547,179.705 cw(c314.198,179.705) 314.198,181.356 321.331,181.356 ccw(c321.331,183.896) 323.871,183.896 T5.2@323.871,184.11
NetC29_1: C29.1 C149.2 C152.2 R11.1 | length 35.7
  Top Layer w0.254: C149.2@255.682,92.202 cw(c255.809,92.202) 255.809,92.329 C152.2@259.938,92.329 259.938,90.678 ccw(c262.478,90.678) 262.478,88.138 267.97,88.138 ccw(c267.97,90.678) 270.51,90.678 270.51,98.806 cw(c272.288,98.806) 272.288,100.584 R11.1@272.542,100.584 cw(c274.447,100.584) 274.447,102.489 C29.1@276.479,102.489
NetC30_1: C30.1 R15.1 R16.2 R18.2 | length 10.5
  Top Layer w0.254: R15.1@303.711,96.52 R18.2@306.36,96.52 R16.2@309.009,96.52 309.009,93.708 ccw(c310.515,93.708) C30.1@310.515,92.202
NetC31_1: C31.1 L17.2 T7.1 | length 12.7
  Top Layer w0.762: L17.2@370.662,176.428 ccw(c370.662,176.479) 370.713,176.479 C31.1@370.713,178.943 370.713,181.57 cw(c373.253,181.57) 373.253,184.11 T7.1@376.8,184.11
NetC35_1: C35.1 U5.36 | length 8.6
  Top Layer w0.254: C35.1@325.628,160.528 327.156,162.056 U5.36@333.55,162.056